# Altium PCB PCB1.PcbDoc (part 3 of 6)
Units mil, origin at the board's own origin, x right, y up, seen from the top; angles counter-clockwise.
Board outline 7480.32 x 4921.26 mil, 4 copper layers (Top Layer, GND, POWER, Bottom Layer), stack 23.756 mil thick; 513 components, 387 nets, 1792 pads, 594 vias.
Unrouted connection lines stored in the file: 21.
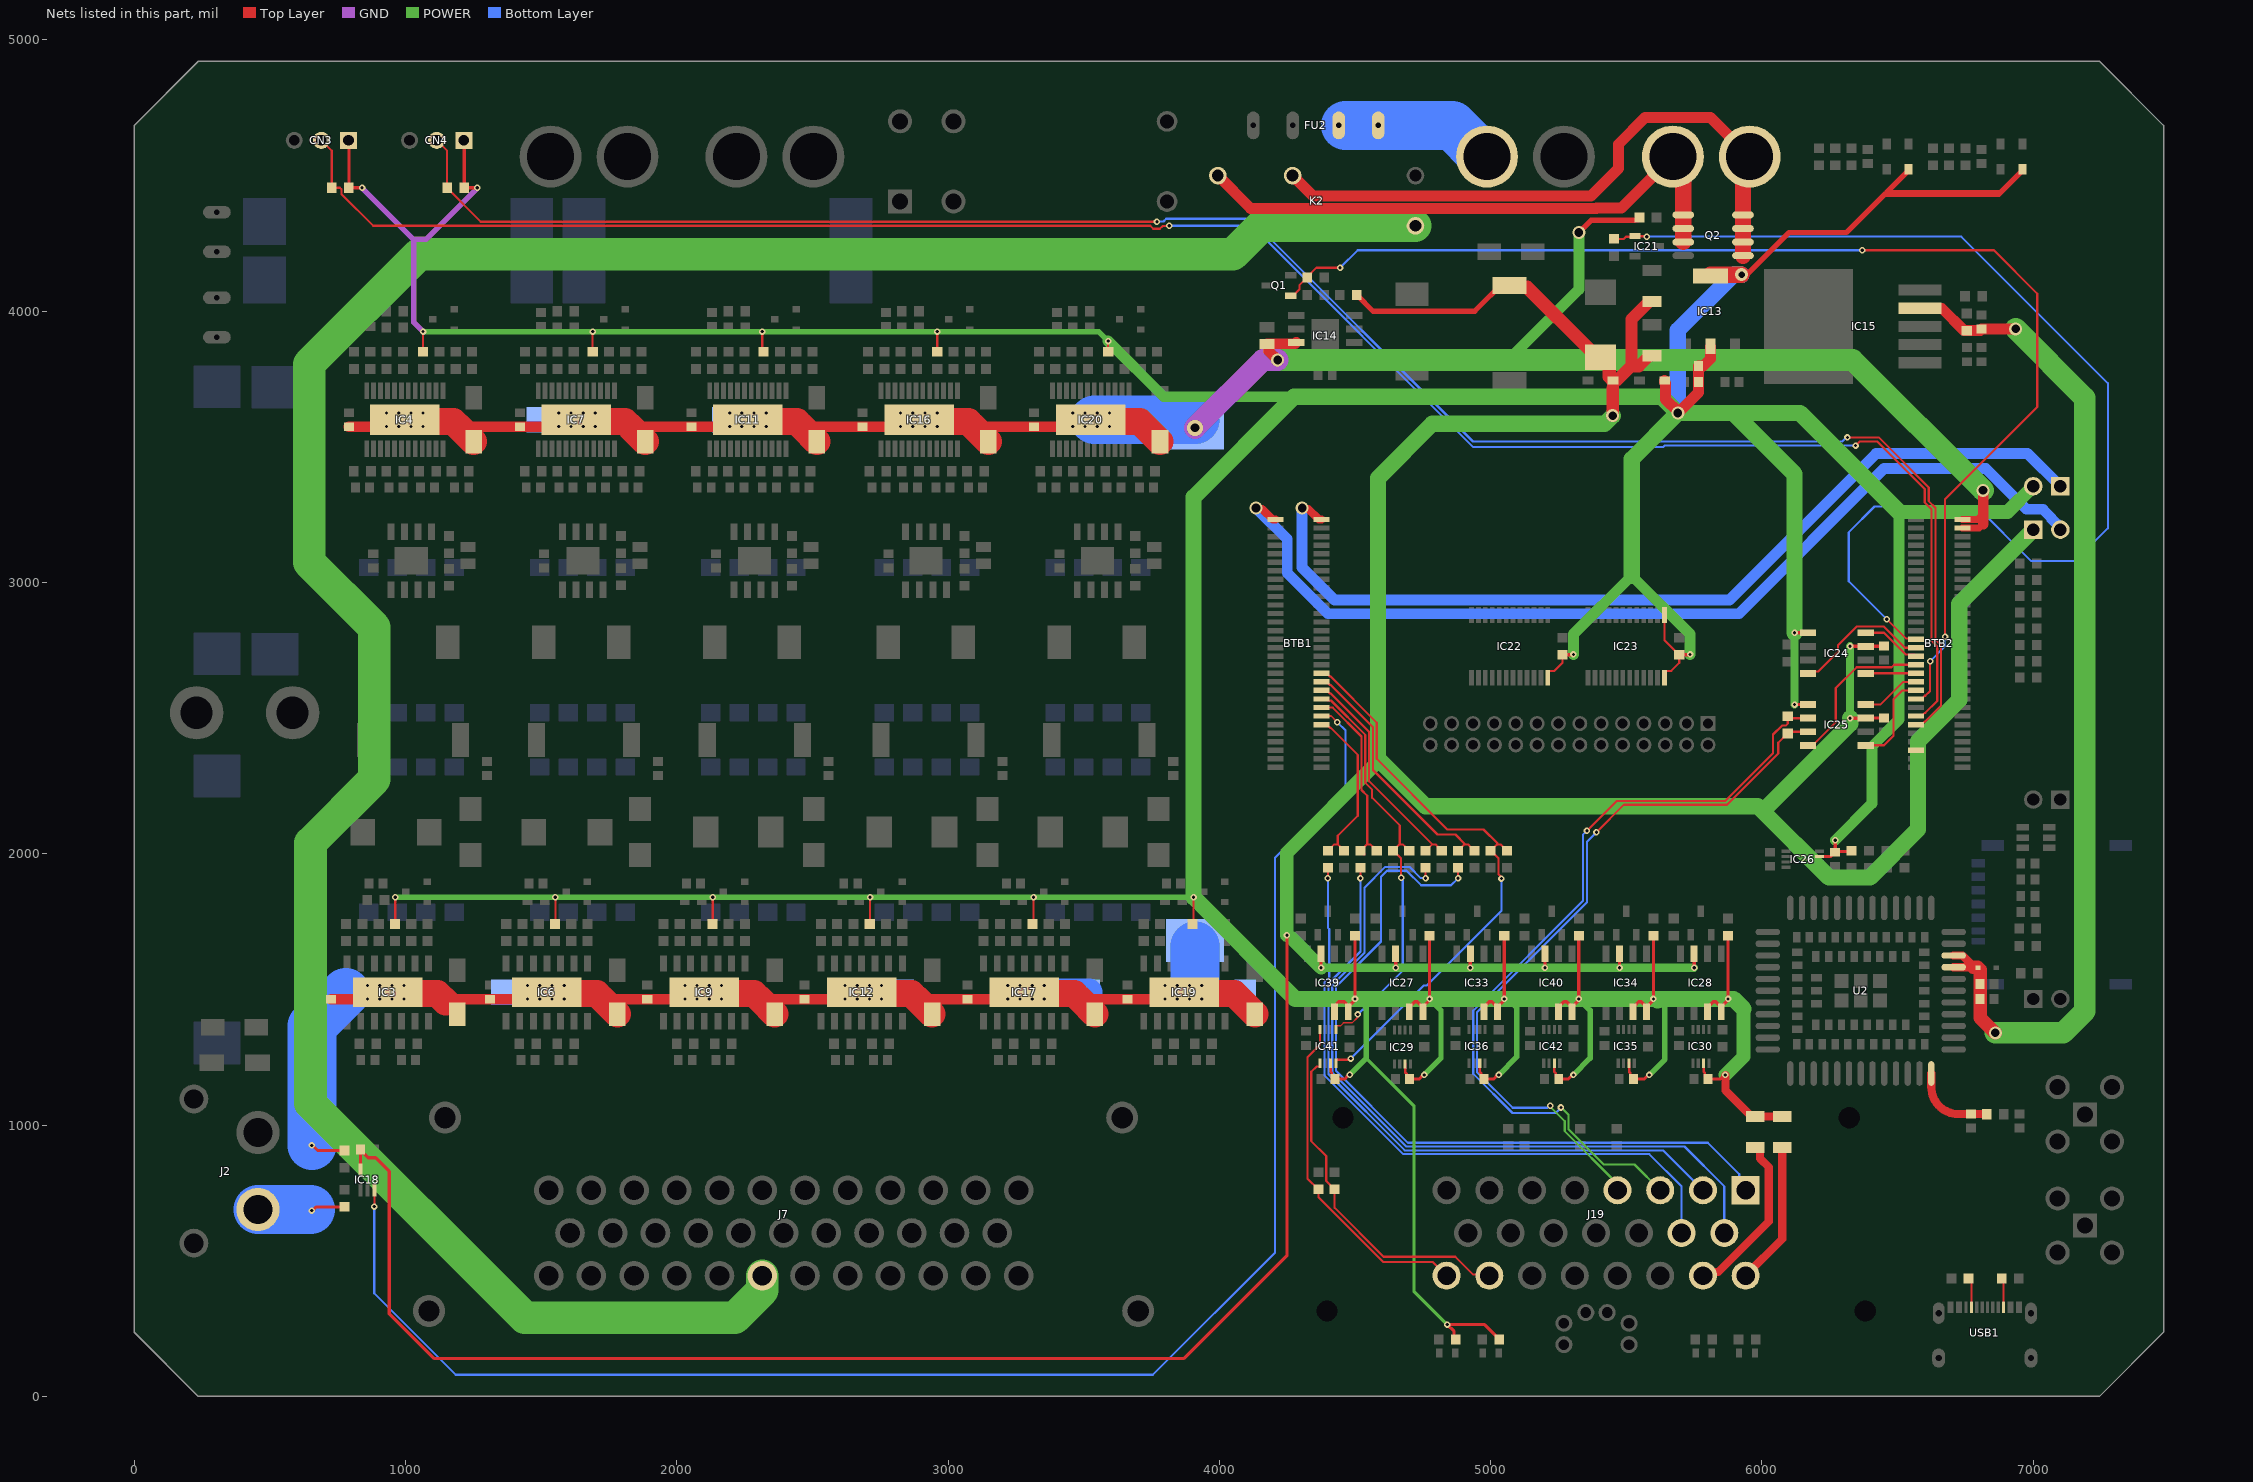
[diagram p4: the nets of this part, all layers, seen from the top]

## Via types
v1: diameter 24, hole 12, Top Layer to Bottom Layer, 532 vias
v2: diameter 48, hole 30, Top Layer to Bottom Layer, 20 vias
v3: diameter 48, hole 24, Top Layer to Bottom Layer, 16 vias
v4: diameter 48, hole 32, Top Layer to Bottom Layer, 10 vias
v5: diameter 60, hole 32, Top Layer to Bottom Layer, 7 vias
v6: diameter 251.97, hole 165.35, Top Layer to Bottom Layer, 4 vias
v7: diameter 31.5, hole 31.5, Top Layer to Bottom Layer, 2 vias
v8: diameter 47.24, hole 47.24, Top Layer to Bottom Layer, 2 vias
v9: diameter 36, hole 24, Top Layer to Bottom Layer, 1 vias

## Nets (pads, with @x,y where several pads share a name; then routed paths per layer and width w, separated by ;. In a path a pad name is that pad's centre, name@x,y a point inside that pad or via, vN(x,y) a via of type N, cw(c..) or ccw(c..) an arc to the next point about the centre after c; other vN are vias at no path point) (continued)
CAN1_STB_PTB24: BTB2.46 IC24.8 | length 516.3
  Top Layer w8: IC24.8@6170,2665 6176.65,2671.65 6206.65,2671.65 6280.23,2745.23 6280.23,2769.09 6348.93,2837.8 6449.02,2837.8 6526.98,2759.84 BTB2.46@6568.5,2759.84
CAN1_TX_PTB22: BTB2.49 IC24.1 | length 186.1
  Top Layer w8: IC24.1@6382.6,2665 6382.95,2665.35 BTB2.49@6568.5,2665.35
CAN2_RX_PTC16: BTB2.50 IC25.4 | length 220.6
  Top Layer w8: IC25.4@6382.6,2550 6436.54,2550 6520.4,2633.86 BTB2.50@6568.5,2633.86
CAN2_STB_PTC15: BTB2.48 IC25.8 | length 595.1
  Top Layer w8: IC25.8@6170,2400 6186.73,2400 6272.23,2485.5 6272.23,2611.09 6348.93,2687.8 6416.27,2687.8 6416.39,2687.68 6478.02,2687.68 6487.19,2696.85 BTB2.48@6568.5,2696.85
CAN2_TX_PTC17: BTB2.51 IC25.1 | length 348.8
  Top Layer w8: IC25.1@6382.6,2400 6449.97,2400 6485,2435.03 6485,2570 6517.36,2602.36 BTB2.51@6568.5,2602.36
CC1: R177.1 USB1.4 | length 111
  Top Layer w8: R177.1@6761.5,435 6772.29,424.2 USB1.4@6772.29,328.51
CC2: R178.1 USB1.10 | length 109.4
  Top Layer w6: R178.1@6883.5,435 6890.4,428.1 USB1.10@6890.4,328.51
DCDC_CTRL_PTD8: BTB2.52 Q1.1 R28.2 | length 4589.3
  Top Layer w8: Q1.1@4263.31,4057.6 4272.17,4057.6 4294.88,4080.31 4294.88,4095.39 4323.5,4124.02 4323.5,4125.98 4357.52,4160 v1(4445,4160) ; v1(6370,4225) 6855,4225 7015,4065 7015,3647.27 6675,3307.27 v1(6675,2800) ; BTB2.52@6568.5,2570.87 6588.19,2570.87 6599.84,2582.52 6602.17,2582.52 6620,2600.35 v1(6620,2710)
  Bottom Layer w8: v1(4445,4160) 4510,4225 v1(6370,4225) ; v1(6620,2710) 6675,2765 v1(6675,2800)
DCDC_IN: CN1.+ FU2.1 | length 569.2
  Bottom Layer w180: 4465,4685.02 FU2.1@4585.67,4685.02 4858.44,4685.02 4973.46,4570 CN1.+@4986.54,4570
DS18B20_DQ1_PTC0: BTB2.54 CN3.2 R118.1 | length 7460
  Top Layer w8: CN3.2@690,4630.01 728.5,4591.5 R118.1@728.5,4455 758.22,4455 763.78,4449.44 763.78,4432.16 880.94,4315 3745,4315 3756,4304 3780.77,4304 3791,4314.23 3814.23,4314.23 v1(3815,4315) ; v1(6345,3505) 6360,3520 6425,3520 6600,3345 6600,3295 6625,3270 6625,2785.2 6646,2764.2 6646,2563.35 6602.17,2519.53 6599.84,2519.53 6588.19,2507.87 BTB2.54@6568.5,2507.87
  Bottom Layer w8: v1(3815,4315) 4120,4315 4936,3499 5635.34,3499 5641.33,3505 v1(6345,3505)
DS18B20_DQ2_PTC1: BTB2.55 CN4.2 R119.1 | length 7075.3
  Top Layer w8: CN4.2@1115,4630 1153.5,4591.5 R119.1@1153.5,4455 1153.5,4454.02 1277.52,4330 v1(3770,4330) ; v1(6315,3535) 6430,3535 6615,3350 6615,3300 6640,3275 6640,2790 6660,2770 6660,2545.86 6602.17,2488.03 6599.84,2488.03 6588.19,2476.38 BTB2.55@6568.5,2476.38
  Bottom Layer w8: v1(3770,4330) 3770.77,4330.77 3794,4330.77 3804.23,4341 4114,4341 4935,3520 6296.57,3520 6311.57,3535 v1(6315,3535)
GLVMS-: BTB2.29 BTB2.30 C1.1 C4.1 C19.1 C20.1 C32.1 C39.1 C49.1 C55.1 C58.1 C60.2 C75.1 C76.1 D1.1 D4.1 D12.1 D13.1 D18.1 D22.1 D26.1 D28.1 D30.1 D33.1 D34.1 IC3.15 IC4.25 IC6.15 IC7.25 IC9.15 IC11.25 IC12.15 IC14.7 IC16.25 IC17.15 IC19.15 IC20.25 J1.1 J1.2 J17.1 J17.2 J20.1 J20.2 J29.1 J29.2 J37.1 J37.2 J41.1 J41.2 J47.1 J47.2 J48.1 J48.2 J55.1 J55.2 J56.1 J56.2 R117.2 R120.2 R146.2 | length 13169.7
  Top Layer w12: v1(655,925) 658.25,925 676.75,906.5 R117.2@775,906.5
  Top Layer w20: v4(5325,4290) 5370,4335 5529.07,4335 5530.37,4336.3 5540.79,4336.3 5548.5,4344.02 R146.2@5548.5,4345
  Top Layer w25: BTB2.29@6738.58,3200.79 6800.79,3200.79 6815.6,3215.6 ; BTB2.30@6738.58,3232.28 6794.73,3232.28 6815,3252.55
  Top Layer w40: C4.1@726.26,1464.02 909.8,1464.02 IC3.15@935.15,1489.37 ; C1.1@791.26,3574.02 971.73,3574.02 IC4.25@997.72,3600 ; 1148.54,1454.82 1157.74,1464.02 C19.1@1311.26,1464.02 1495.91,1464.02 IC6.15@1521.26,1489.37 ; 1177.05,3593.5 1196.54,3574.02 C20.1@1422.51,3574.02 1603.87,3574.02 IC7.25@1629.85,3600 ; 1705.32,1485.24 1726.54,1464.02 C32.1@1891.26,1464.02 2075.91,1464.02 IC9.15@2101.26,1489.37 ; 1809.55,3593.5 1829.04,3574.02 C39.1@2053.76,3574.02 2236,3574.02 IC11.25@2261.99,3600 ; 2285.32,1485.24 2306.54,1464.02 C49.1@2471.26,1464.02 2655.91,1464.02 IC12.15@2681.26,1489.37 ; 2442.05,3593.5 2461.54,3574.02 C55.1@2685.01,3574.02 2868.14,3574.02 IC16.25@2894.12,3600 ; 2865.31,1485.24 2886.54,1464.02 C58.1@3071.26,1464.02 3255.91,1464.02 IC17.15@3281.26,1489.37 ; 3074.55,3593.5 3094.04,3574.02 C75.1@3316.26,3574.02 3500.28,3574.02 IC20.25@3526.26,3600 ; 3465.31,1485.24 3486.54,1464.02 C76.1@3661.26,1464.02 3845.91,1464.02 IC19.15@3871.26,1489.37 ; v4(4215,3820) 4182.36,3852.64 4182.36,3877.8 C60.2@4181.26,3878.9 ; IC14.7@4283.23,3885 4278.23,3880 4176.1,3880 C60.2@4175,3878.9 ; v4(6815,3340) 6815.6,3339.4 6815.6,3215.6 ; C60.2@4175,3878.9 C60.2@4181.26,3878.9 ; C60.2@4175,3878.9 C60.2@4181.26,3878.9
  Top Layer w100: IC3.15@935.15,1489.37 948.6,1488.66 951.25,1488.52 993.48,1486.28 996.12,1486.14 1013.1,1485.24 1118.13,1485.24 1148.54,1454.82 ; IC4.25@997.72,3600 1004.21,3593.5 1177.05,3593.5 ; 1196.54,3574.02 D1.1@1251.26,3519.29 ; IC6.15@1521.26,1489.37 1525.39,1485.24 1705.32,1485.24 ; IC7.25@1629.85,3600 1636.35,3593.5 1809.55,3593.5 ; 1726.54,1464.02 D12.1@1781.26,1409.29 ; 1829.04,3574.02 D13.1@1883.76,3519.29 ; IC9.15@2101.26,1489.37 2105.39,1485.24 2285.32,1485.24 ; IC11.25@2261.99,3600 2268.48,3593.5 2442.05,3593.5 ; 2306.54,1464.02 D18.1@2361.26,1409.29 ; 2461.54,3574.02 D22.1@2516.26,3519.29 ; IC12.15@2681.26,1489.37 2685.39,1485.24 2865.31,1485.24 ; 2886.54,1464.02 D26.1@2941.26,1409.29 ; IC16.25@2894.12,3600 2900.62,3593.5 3074.55,3593.5 ; 3094.04,3574.02 D28.1@3148.76,3519.29 ; IC17.15@3281.26,1489.37 3285.39,1485.24 3465.31,1485.24 ; 3486.54,1464.02 D30.1@3541.26,1409.29 ; IC20.25@3526.26,3600 3532.76,3593.5 3707.05,3593.5 D33.1@3781.26,3519.29 ; IC19.15@3871.26,1489.37 3875.39,1485.24 4055.31,1485.24 D34.1@4131.26,1409.29
  GND w80: v5(3910,3570) 4160,3820 v4(4215,3820)
  POWER w40: 5065,3820 5325,4080 v4(5325,4290)
  POWER w80: v4(4215,3820) 5065,3820 6335,3820 v4(6815,3340)
  Bottom Layer w100: J47.1@3409.8,1490 J41.2@3520,1490
  Bottom Layer w180: v1(655,925) 655,1365 J56.2@780,1490 ; J17.1@3539.8,3600 J1.2@3910,3600 ; 3910,1535 J1.1@3910,1660
  other v1: 860,1465 905,1465 950,1465 995,1465 1450,1465 1495,1465 1540,1465 1585,1465 2030,1465 2075,1465 2120,1465 2165,1465 2620,1465 2665,1465 2710,1465 2755,1465 3220,1465 3265,1465 3310,1465 3355,1465 3800,1465 3845,1465 3890,1465 3935,1465 860,1515 905,1515 950,1515 995,1515 1450,1515 1495,1515 1540,1515 1585,1515 2030,1515 2075,1515 2120,1515 2165,1515 2620,1515 2665,1515 2710,1515 2755,1515 3220,1515 3265,1515 3310,1515 3355,1515 3800,1515 3845,1515 3890,1515 3935,1515 930,3575 975,3575 1020,3575 1065,3575 1565,3575 1610,3575 1655,3575 1700,3575 2195,3575 2240,3575 2285,3575 2330,3575 2825,3575 2870,3575 2915,3575 2960,3575 3460,3575 3505,3575 3550,3575 3595,3575 930,3625 975,3625 1020,3625 1065,3625 1565,3625 1610,3625 1655,3625 1700,3625 2195,3625 2240,3625 2285,3625 2330,3625 2825,3625 2870,3625 2915,3625 2960,3625 3460,3625 3505,3625 3550,3625 3595,3625
GLVMS-_IN: J2.- R120.1 R122.2 | length 320.4
  Top Layer w12: v1(655,685) 658.25,685 671.75,698.5 R122.2@775,698.5
  Bottom Layer w180: J2.-@456.22,689.02 R120.1@650.98,689.02